# Altium PCB CRF18-1.PcbDoc (part 2 of 2)
Units mm, origin at the board's own origin, x right, y up, seen from the top; angles counter-clockwise.
Board outline 161.4 x 100 mm, 4 copper layers (Top Layer, Internal Plane 1, Internal Plane 2, Bottom Layer), stack 1.503 mm thick; 213 components, 165 nets, 674 pads, 349 vias.
Unrouted connection lines stored in the file: 9.
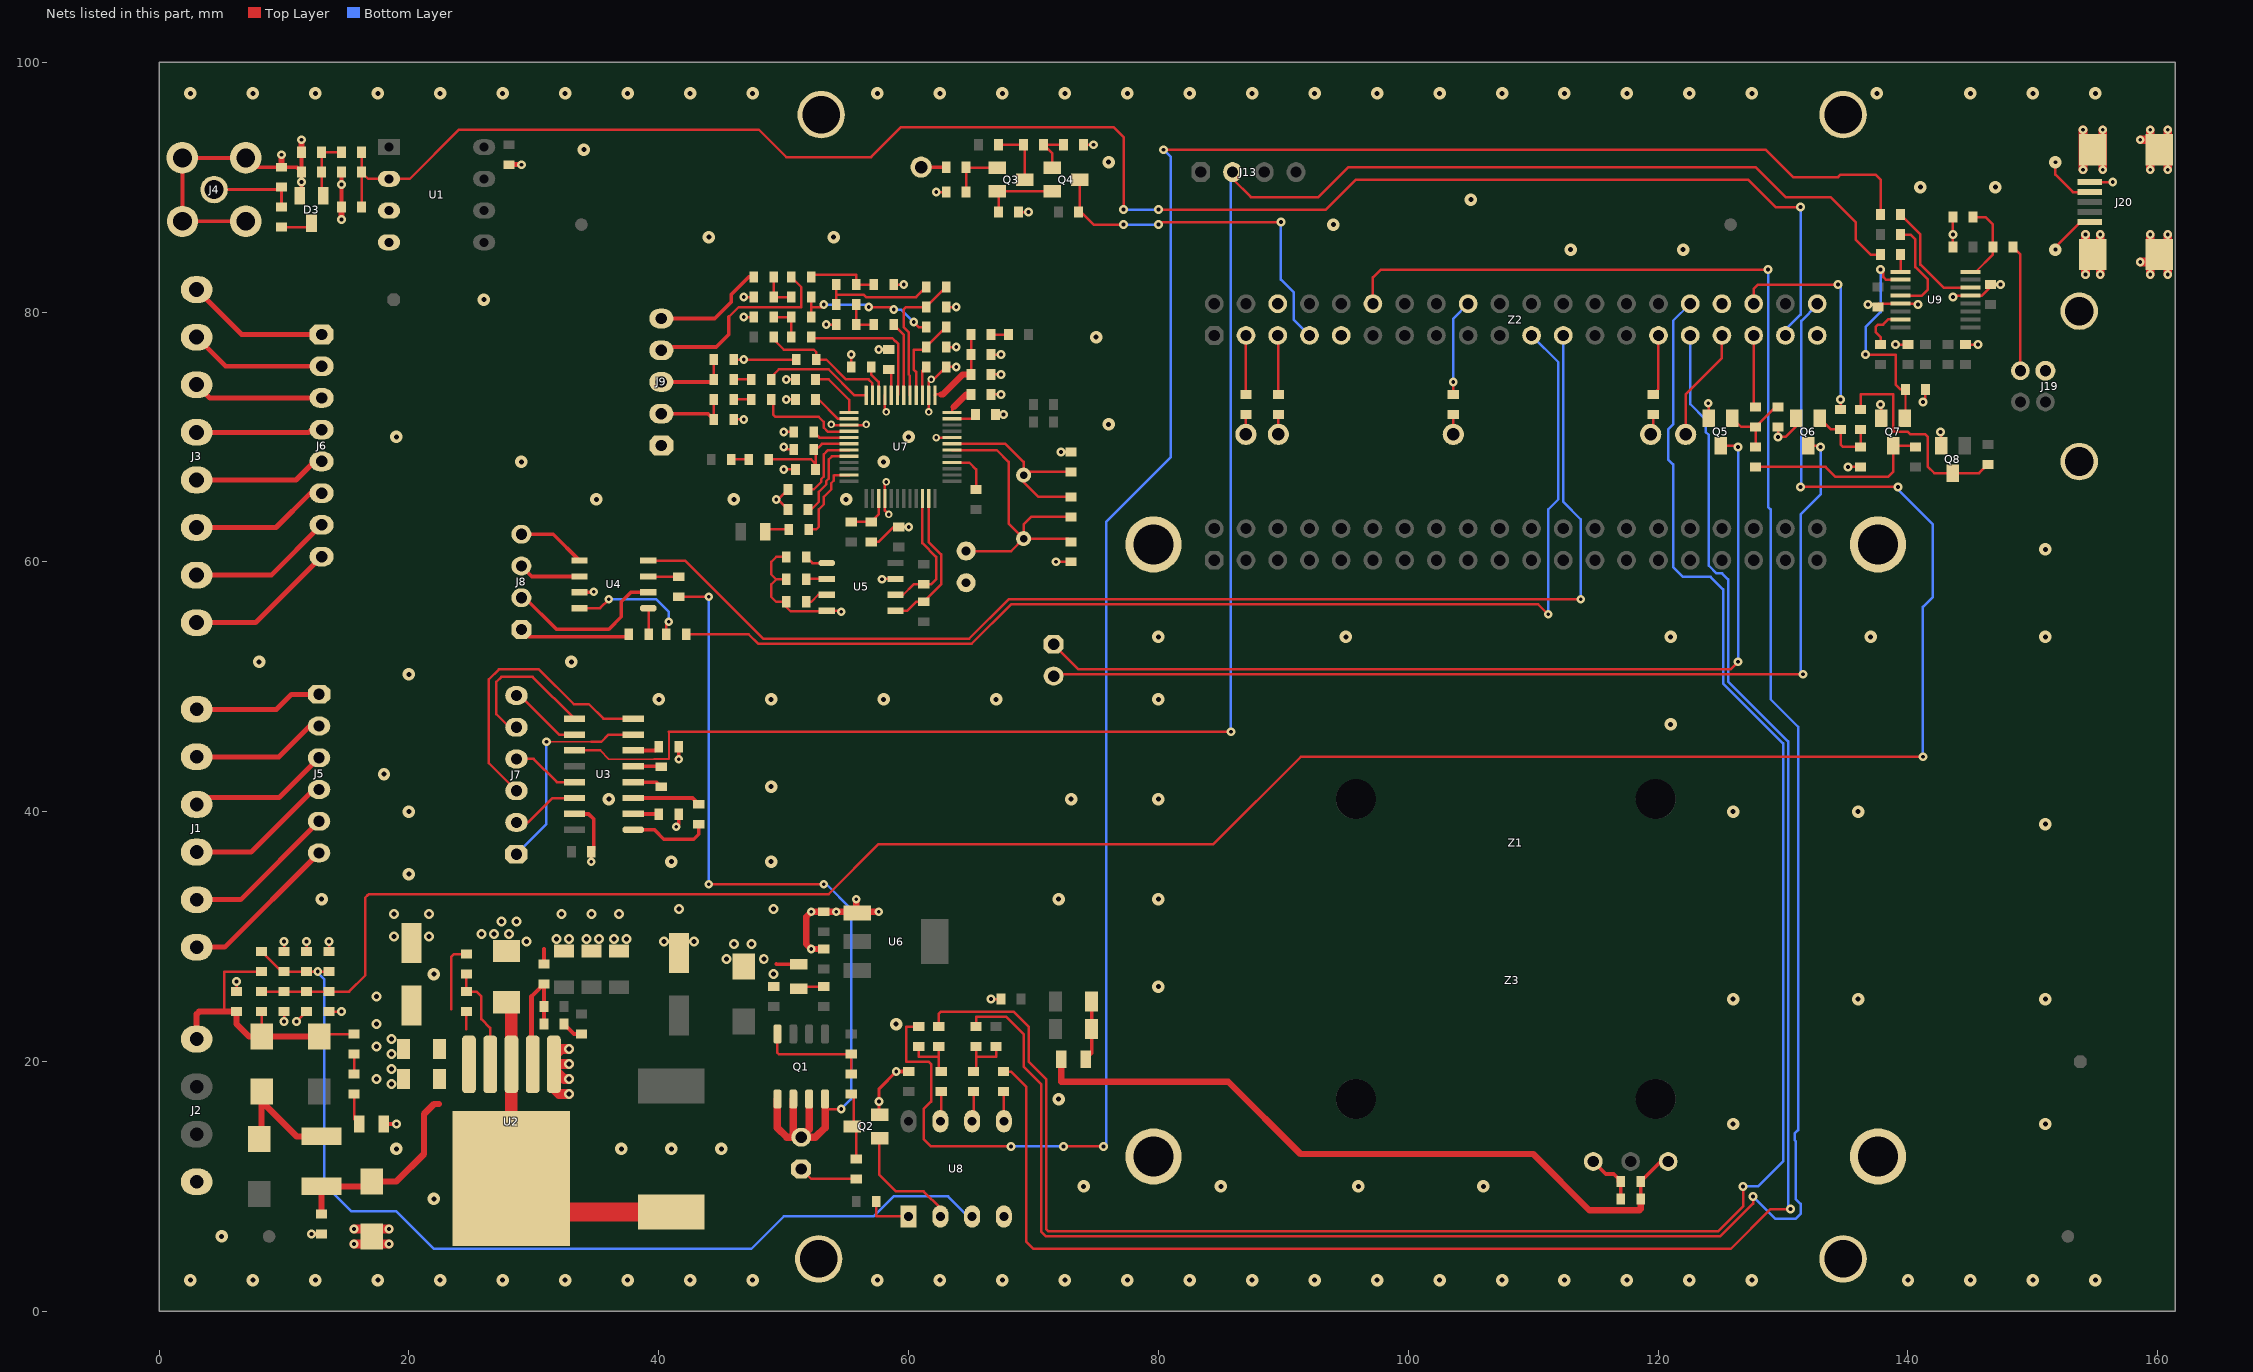
[diagram p4: the nets of this part, all layers, seen from the top]

## Via types
v1: diameter 0.7, hole 0.3, Top Layer to Bottom Layer, tented both sides, 157 vias
v2: diameter 1, hole 0.4, Top Layer to Bottom Layer, 127 vias
v3: diameter 0.8, hole 0.4, Top Layer to Bottom Layer, tented both sides, 40 vias
v4: diameter 0.7, hole 0.3, Top Layer to Bottom Layer, 15 vias
v5: diameter 0.6, hole 0.3, Top Layer to Bottom Layer, tented both sides, 8 vias
v6: diameter 1, hole 0.3, Top Layer to Bottom Layer, 2 vias

## Nets (pads, with @x,y where several pads share a name; then routed paths per layer and width w, separated by ;. In a path a pad name is that pad's centre, name@x,y a point inside that pad or via, vN(x,y) a via of type N, cw(c..) or ccw(c..) an arc to the next point about the centre after c; other vN are vias at no path point) (continued)
FTXD: J13.2 R80.1 U3.11 | length 157.6
  Top Layer w0.15: 35.295,44.905 36,44.2 39.611,44.2 39.636,44.225 40.764,44.225 40.789,44.2 40.8,44.2 40.8,46.4
  Top Layer w0.2: U3.11@33.25,44.905 35.295,44.905 ; 40.8,46.4 v1(85.8,46.4) ; J13.2@85.93,91.2 85.93,90.67 87.4,89.2 92.8,89.2 95.2,91.6 127.8,91.6 130.2,89.2 133.8,89.2 135.8,87.2 135.8,85.8 137,84.6 R80.1@137.8,84.6
  Bottom Layer w0.2: v1(85.8,46.4) 85.8,91.07 J13.2@85.93,91.2
FWDIN: R46.1 R82.1 | length 170.3
  Top Layer w0.2: R46.1@60.8,22.8 59.8,22.8 59.8,20 61.6,20 61.8,19.8 61.8,16.8 61.2,16.2 61.2,13.8 61.8,13.2 v4(68.2,13.2) ; v4(72.4,13.2) v1(75.6,13.2) ; v1(80.4,93) 128.6,93 130.8,90.8 134.4,90.8 134.6,91 137.4,91 137.8,90.6 R82.1@137.8,87.8
  Bottom Layer w0.2: v4(68.2,13.2) v4(72.4,13.2) ; v1@75.8,13.2 75.8,63.2 81,68.4 81,92.4 v1(80.4,93)
GND: C1.2 C3.2 C4.2 C5.2 C6.2 C7.1 C8.2 C9.2 C10.2 C12.2 C14.2 C15.2 C16.2 C17.2 C18.2 C19.1 C20.1 C23.2 C24.2 C25.2 C26.2 C28.1 C29.2 C30.1 C31.2 C32.2 C33.2 C34.2 C35.2 C37.2 C38.2 C39.1 C40.2 C41.2 C42.2 C43.2 C44.1 C45.2 C46.1 C47.1 C48.2 C49.2 C50.2 C51.2 C52.2 C53.2 C54.2 C55.1 C56.1 C57.2 D3.2 D5.K D6.A D7.A D8.A D10.K J2.4 J4.1 J9.1 J10.1 J19.4 J19.5 J19.6 J20.BODY J20.GND pad. Q2.S Q5.S Q6.S Q7.S Q8.S R3.2 R4.1 R5.1 R6.2 R7.1 R8.1 R9.2 R14.2 R24.2 R26.1 R27.1 R28.1 R29.1 R30.1 R35.2 R41.2 R43.2 R45.2 R51.2 R58.2 R67.2 R75.2 R77.2 R83.1 R87.1 R88.2 U1.3 U1.4 U2.1 U3.15 U4.7 U5.4 U5.7 U6.1 U7.8 U7.14 U7.21 U7.27 U7.40 U8.4 U9.5 U9.13 Z1.0 Z2.6 Z2.9 Z2.34 Z2.39 Z3.3 | length 197.5
  Top Layer w0.2: C1.2@6.2,25.6 v1(6.2,26.4) ; v1(10,23.2) R4.1@10,24 ; R5.1@10,28.8 v1(10,29.6) ; v1(11,23.2) 11.2,23.4 R7.1@11.8,24 ; R8.1@11.8,28.8 v1(11.8,29.6) ; C5.2@13.6,24 v1(14.6,24) ; C6.2@13.6,28.8 v1(13.6,29.6) ; C23.2@46,71.4 v1(46.8,71.4) ; C24.2@46,76.2 v1(46.8,76.2) R35.2@51,76.2 ; v1(46.8,79.6) C25.2@47.6,79.6 ; v1(46.8,81.2) R24.2@47.6,81.2 ; v1(49.4,65) v1@49.55,65 ; v1(50,67.4) C30.1@50.95,67.4 ; v1(50,69.2) 50.2,69 C28.1@50.8,69 ; v1(50,70.4) C29.2@50.8,70.4 ; R27.1@50.2,58.6 49.4,58.6 ; R28.1@50.2,60.4 49.4,60.4 49,60 49,59 49.4,58.6 ; v1(50.2,73) C31.2@50.95,73 ; v1(50.2,74.6) C32.2@50.95,74.6 ; R29.1@50.35,64.2 v1@49.55,65 ; R30.1@50.35,65.8 v1@49.55,65 ; J10.1@51.4,11.4 52.2,10.6 R41.2@55.8,10.6 ; v1(53.4,79) C35.2@54.2,79 ; v5(53.8,71) 53.85,70.95 U7.27@55.225,70.95 56.55,70.95 v5(56.6,71) ; v1(54.6,56) 54.505,56.095 U5.4@53.45,56.095 53.45,56.05 50.55,56.05 50.2,56.4 R26.1@50.2,56.8 49.4,56.8 49,57.2 49,58.2 49.4,58.6 ; C37.2@55.4,75.6 v1(55.4,76.6) ; R43.2@57,61.6 57.6,61.6 58.8,62.8 C39.1@59.2,62.8 v1(60,62.8) ; v1(57.6,77) C38.2@58.4,77 ; v1(57.87,58.6) 57.835,58.635 U5.7@58.95,58.635 ; U7.21@58.1,73.325 58.1,72.1 v5(58.2,72) ; v5(58.2,66.4) 58.1,66.3 U7.40@58.1,65.075 58.1,64.1 v5(58.4,63.8) ; R45.2@58.8,82.2 v1(59.6,82.2) ; v5(61.6,72) U7.14@61.6,73.325 61.6,74.4 v5(61.8,74.6) 62,74.6 C41.2@63,75.6 v1(63.8,75.6) ; v5(62.2,69.95) U7.8@63.475,69.95 ; v1(62.2,89.6) R51.2@63,89.6 ; C42.2@63,77.2 v1(63.8,77.2) ; C43.2@63,80.4 v1(63.8,80.4) ; v4(66.6,25) C49.2@67.4,25 ; C45.2@66.6,73.4 v1(67.4,73.4) ; C46.1@66.6,75 v1(67.4,75) ; C47.1@66.6,76.6 v1(67.4,76.6) ; C48.2@66.95,71.8 v1(67.6,71.8) ; R58.2@68.8,88 v1(69.6,88) ; v1(71.8,60) C50.2@73,60 ; v1(72.2,68.8) C51.2@73,68.8 ; R67.2@74,93.4 v1(74.8,93.4) ; v1(124,72.7) 124.05,72.75 Q5.S@124.05,71.5 ; R75.2@129.6,70.8 v1(129.6,70) 130.2,70 131.05,70.85 Q6.S@131.05,71.5 ; v1(135.2,67.6) R77.2@136.2,67.6 ; v1(136.8,80.6) 137.6,80.6 137.682,80.682 U9.5@139.4,80.682 140.718,80.682 v1(140.8,80.6) ; v1(137.8,72.6) 137.85,72.55 Q7.S@137.85,71.5 ; v1(139,77.4) C55.1@140,77.4 ; v1(141.2,72.8) 141.4,73 R83.1@141.4,73.8 ; v1(142.6,70.4) 142.65,70.35 Q8.S@142.65,69.3 ; v1(143.6,81.2) 143.717,81.317 U9.13@145,81.317 145.917,81.317 146.6,82 C57.2@146.6,82.2 v1(147.4,82.2) ; R87.1@143.6,85.2 v1(143.6,86.2) R88.2@143.6,87.6 ; C56.1@144.6,77.4 v1(145.6,77.4) ; J20.GND@154.55,90.4 v1(156.4,90.4)
  Top Layer w0.25: Q2.S@57.632,15.74 v4(57.632,16.8) 57.632,17.832 v1(59,19.2)
  Top Layer w0.3: J4.1@6.94,87.26 J4.1@1.86,87.26 J4.1@1.86,92.34 J4.1@6.94,92.34 7.68,91.6 R3.2@9.8,91.6 11,91.6 R6.2@11.4,91.2 ; D3.2@11.25,89.3 11.4,89.45 v1(11.4,90.4) R6.2@11.4,91.2 ; C3.2@11.4,92.8 R6.2@11.4,91.2 ; v1(12.2,6.2) C4.2@13,6.2 ; R9.2@14.6,88.4 C7.1@14.6,91.2 ; D5.K@17.985,15 v1(19,15) ; R14.2@30.8,27.8 30.8,29 ; U3.15@33.25,39.825 34.375,39.825 34.8,39.4 34.8,37 C15.2@34.6,36.8 v1(34.6,36) ; U4.7@33.65,57.565 34.765,57.565 v1(34.8,57.6) ; v1(41.4,38.8) 41.6,39 C19.1@41.6,39.8 ; v1(41.6,44.2) C20.1@41.6,45.2 ; 49.4,27.8 49.415,27.785 D10.K@51.2,27.785 ; Z3.3@114.8,12 115.8,11 116.449,11 116.8,10.649 116.8,10.4 C53.2@117,10.4 C52.2@117,9
  Top Layer w0.33: v1(59,19.2) C40.2@60,19.2
  Top Layer w0.4: C12.2@28,91.8 v1(29,91.8)
  Top Layer w0.5: R3.2@9.8,91.6 v1(9.8,92.6) ; C3.2@11.4,92.8 v1(11.4,93.8) ; v1(14.6,87.4) R9.2@14.6,88.4 ; C33.2@53.2,29 v1(52.2,29) 51.8,29.4 51.8,31.6 v1(52.2,32) C34.2@53.2,32 U6.1@55.8,32 ; v1(55.8,33) U6.1@55.8,32 ; U6.1@55.9,31.9 U6.1@55.8,32 ; v1(57.6,32) U6.1@55.8,32
  Top Layer w0.7: v1(15.6,5.4) v1(18.4,5.4) ; v1(15.6,6.6) v1(18.4,6.6) ; v1(154,91.4) v1(154,94.6) ; v1(154.2,83) v1(154.2,86.2) ; v1(155.4,83) v1(155.4,86.2) ; v1(155.6,91.4) v1(155.6,94.6) ; v1(158.6,84) J20.BODY@159.4,84 ; v1(158.6,93.8) J20.BODY@159.4,93.8 ; v1(159.4,83) J20.BODY@159.4,84 ; v1(159.4,86.2) J20.BODY@159.4,84 ; v1(159.4,91.4) J20.BODY@159.4,93.8 ; v1(159.4,94.6) J20.BODY@159.4,93.8 ; J20.BODY@159.5,84 J20.BODY@159.4,84 ; J20.BODY@160.1,93.1 J20.BODY@159.4,93.8 ; v1(160.8,83) v1(160.8,86.2) ; v1(160.8,91.4) v1(160.8,94.6)
  Top Layer w0.8: v3(32.8,17.4) 32,17.4 31.6,17.8 U2.1@31.6,19.4 ; v3(32.8,18.6) 32.4,18.6 U2.1@31.6,19.4 ; v3(32.8,19.8) 31.625,19.8 U2.1@31.6,19.775 ; v3(32.8,21) 32.2,21 31.6,20.4 U2.1@31.6,19.775 ; U2.1@31.6,19.4 U2.1@31.6,19.775
  other v1: 54.2,32 14.6,90.2
  other v2: 2.5,2.5 7.5,2.5 12.5,2.5 17.5,2.5 22.5,2.5 27.5,2.5 32.5,2.5 37.5,2.5 42.5,2.5 47.5,2.5 57.5,2.5 62.5,2.5 67.5,2.5 72.5,2.5 77.5,2.5 82.5,2.5 87.5,2.5 92.5,2.5 97.5,2.5 102.5,2.5 107.5,2.5 112.5,2.5 117.5,2.5 122.5,2.5 127.5,2.5 140,2.5 145,2.5 150,2.5 155,2.5 5,6 22,9 74,10 85,10 96,10 106,10 19,13 37,13 41,13 45,13 126,15 151,15 72,17 59,23 126,25 136,25 151,25 80,26 22,27 13,33 72,33 80,33 20,35 41,36 49,36 151,39 20,40 126,40 136,40 36,41 73,41 80,41 49,42 18,43 121,47 40,49 49,49 58,49 67,49 80,49 20,51 8,52 33,52 80,54 95,54 121,54 137,54 151,54 151,61 35,65 46,65 55,65 29,68 58,68 19,70 60,70 76,71 75,78 26,81 113,85 122,85 44,86 54,86 94,87 105,89 141,90 147,90 76,92 34,93 2.5,97.5 7.5,97.5 12.5,97.5 17.5,97.5 22.5,97.5 27.5,97.5 32.5,97.5 37.5,97.5 42.5,97.5 47.5,97.5 57.5,97.5 62.5,97.5 67.5,97.5 72.5,97.5 77.5,97.5 82.5,97.5 87.5,97.5 92.5,97.5 97.5,97.5 102.5,97.5 107.5,97.5 112.5,97.5 117.5,97.5 122.5,97.5 127.5,97.5 137.5,97.5 145,97.5 150,97.5 155,97.5
  other v3: 18.6,18.2 17.4,18.6 18.6,19.4 18.6,20.6 17.4,21.2 18.6,21.8 17.4,23 17.4,25.2 49.2,27 45.4,28.2 48.4,28.2 46,29.4 47.4,29.4 29.4,29.6 40.4,29.6 42.8,29.6 31.8,29.8 32.8,29.8 34.2,29.8 35.2,29.8 36.4,29.8 37.4,29.8 18.8,30 21.6,30 25.8,30.2 26.8,30.2 28,30.2 27.4,31.2 28.6,31.2 18.8,31.8 21.6,31.8 32.2,31.8 34.6,31.8 36.8,31.8 41.6,32.2 49.2,32.2
GPIN: R18.2 Z2.21 | length 94.5
  Top Layer w0.2: R18.2@42.2,54.2 47.2,54.2 47.95,53.45 65.05,53.45 68.2,56.6 110.4,56.6 v1(111.2,55.8)
  Bottom Layer w0.2: Z2.21@109.867,78.126 112,75.993 112,65 111.2,64.2 v1(111.2,55.8)
GPIO1PPS: Q4.D R66.2 Z2.7 | length 29.4
  Top Layer w0.2: R66.2@73.6,88 R66.2@73.7,88.1 ; Q4.D@73.7,90.6 R66.2@73.7,88.1 ; v1(77.2,87) 74.8,87 R66.2@73.7,88.1 ; v1(80,87) 80,87.2 v1(89.8,87.2)
  Bottom Layer w0.2: v1(77.2,87) v1(80,87) ; v1(89.8,87.2) 89.8,82.6 90.813,81.587 90.813,79.4 Z2.7@92.087,78.126
GPLEDA: J8.1 R17.1 | length 8.9
  Top Layer w0.3: J8.1@29,54.59 29.59,54 37.4,54 R17.1@37.6,54.2
GPLEDK: J8.2 U4.2 | length 13.1
  Top Layer w0.3: J8.2@29,57.13 29.27,57.13 31.8,54.6 36,54.6 37,55.6 37,56.8 37.765,57.565 U4.2@39.15,57.565
GPOUT: U4.4 Z2.23 | length 100.2
  Top Layer w0.2: U4.4@39.15,60.105 42.095,60.105 48.35,53.85 64.85,53.85 68,57 v1(113.8,57)
  Bottom Layer w0.2: Z2.23@112.407,78.126 112.407,64.793 113.8,63.4 v1(113.8,57)
GPQC: J8.3 U4.6 | length 5
  Top Layer w0.3: J8.3@29,59.67 29.835,58.835 U4.6@33.65,58.835
GPQE: J8.4 U4.5 | length 5.5
  Top Layer w0.3: J8.4@29,62.21 31.545,62.21 U4.5@33.65,60.105
IDA: J20.ID | length 4.3
  Top Layer w0.2: v6(151.8,92) 151.8,91 153.2,89.6 J20.ID@154.55,89.6
NetC2_2: C2.2 D3.3 | length 2.5
  Top Layer w0.2: C2.2@9.8,86.8 11.9,86.8 D3.3@12.2,87.1
NetC3_1: C3.1 D3.1 R6.1 R10.2 | length 5
  Top Layer w0.2: D3.1@13,89.45 R6.1@13,91.2 C3.1@13,92.8 R10.2@14.6,92.8
NetC11_2: C11.2 R13.1 U2.4 | length 8.5
  Top Layer w0.2: C11.2@24.6,27 R13.1@24.6,25.6 25.4,25.6 25.8,25.2 25.8,23.4 26.5,22.7 U2.4@26.5,19.775
NetC19_2: C19.2 U3.2 | length 2.1
  Top Layer w0.3: U3.2@37.95,39.825 39.975,39.825 C19.2@40,39.8
NetC20_2: C20.2 U3.6 | length 2.2
  Top Layer w0.3: U3.6@37.95,44.905 39.705,44.905 C20.2@40,45.2
NetC21_1: C21.1 U3.4 | length 2.4
  Top Layer w0.3: U3.4@37.95,42.365 39.835,42.365 C21.1@40.2,42
NetC21_2: C21.2 U3.5 | length 2.3
  Top Layer w0.3: U3.5@37.95,43.635 40.165,43.635 C21.2@40.2,43.6
NetC22_1: C22.1 U3.1 | length 6.5
  Top Layer w0.3: U3.1@37.95,38.555 39.645,38.555 40.4,37.8 42.8,37.8 43.2,38.2 C22.1@43.2,39
NetC22_2: C22.2 U3.3 | length 5.5
  Top Layer w0.3: U3.3@37.95,41.095 42.705,41.095 C22.2@43.2,40.6
NetC25_1: C25.1 R32.2 R33.1 | length 3
  Top Layer w0.2: C25.1@49.2,79.6 R33.1@50.6,79.6 R32.2@50.6,78
NetC27_1: C27.1 L6.2 R33.2 | length 11.7
  Top Layer w0.2: R33.2@52.2,79.6 52.2,80.4 ; C27.1@52.2,81.2 52.2,80.4 ; v1(53.2,80.6) 53,80.4 52.2,80.4 ; v1(56.8,80.4) 58.6,80.4 v1(58.8,80.2) ; v1(60.4,79.2) 60.8,78.8 L6.2@61.4,78.8
  Bottom Layer w0.2: v1(53.2,80.6) 56.8,80.6 v1(56.8,80.4) ; v1(58.8,80.2) 59.4,80.2 v1(60.4,79.2)
NetC27_2: C27.2 R24.1 R25.1 | length 3
  Top Layer w0.2: R25.1@49.2,82.8 R24.1@49.2,81.2 C27.2@50.6,81.2
NetC28_2: C28.2 C30.2 L3.1 U7.30 | length 8.5
  Top Layer w0.2: L3.1@48.8,68.2 52.2,68.2 C30.2@52.55,67.85 ; C30.2@52.55,67.4 C30.2@52.55,67.85 ; U7.30@55.225,69.45 53.05,69.45 52.4,68.8 52.55,68.65 C30.2@52.55,67.85
NetC29_1: C29.1 U7.29 | length 3
  Top Layer w0.2: C29.1@52.4,70.4 52.85,69.95 U7.29@55.225,69.95
NetC31_1: C31.1 U7.26 | length 3.3
  Top Layer w0.2: C31.1@52.55,73 52.8,73 54.35,71.45 U7.26@55.225,71.45
NetC32_1: C32.1 U7.25 | length 4.4
  Top Layer w0.2: C32.1@52.55,74.6 53.6,74.6 55.225,72.975 U7.25@55.225,71.95
NetC35_1: C35.1 R37.1 R44.2 | length 3
  Top Layer w0.2: R37.1@55.8,80.6 C35.1@55.8,79 R44.2@57.2,79
NetC36_1: C36.1 L7.2 R37.2 | length 9.2
  Top Layer w0.2: R37.2@54.2,80.6 54.2,81.4 ; C36.1@54.2,82.2 54.2,81.4 ; L7.2@61.4,82 60.6,81.2 56.6,81.2 56.4,81.4 54.2,81.4
NetC36_2: C36.2 R34.1 R45.1 | length 5.9
  Top Layer w0.2: R34.1@52.2,82.8 52.4,83 55.8,83 C36.2@55.8,82.2 R45.1@57.2,82.2
NetC37_1: C37.1 U7.22 | length 2.5
  Top Layer w0.2: C37.1@57,75.6 57,75 57.6,74.4 U7.22@57.6,73.325
NetC38_1: C38.1 U7.20 | length 2.2
  Top Layer w0.2: C38.1@58.4,75.4 58.6,75.2 U7.20@58.6,73.325
NetC41_1: C41.1 U7.15 | length 2.4
  Top Layer w0.2: U7.15@61.1,73.325 61.1,75.3 C41.1@61.4,75.6
NetC42_1: C42.1 L6.1 U7.16 | length 7.1
  Top Layer w0.2: U7.16@60.6,73.325 60.6,75.2 60.4,75.4 60.4,77 61.2,77 C42.1@61.4,77.2 L6.1@63,78.8
NetC43_1: C43.1 L7.1 U7.17 | length 11.2
  Top Layer w0.2: U7.17@60.1,73.325 60.1,74.9 60,75 60,78.4 59.6,78.8 59.6,80.2 59.8,80.4 C43.1@61.4,80.4 L7.1@63,82
NetC44_2: C44.2 C50.1 R68.2 U7.6 Y1.1 | length 25.7
  Top Layer w0.2: U7.6@63.475,68.95 67.05,68.95 68,68 68,63.06 Y1.1@69.2,61.86 ; C44.2@64.6,60.87 68.21,60.87 Y1.1@69.2,61.86 ; C50.1@73,61.6 72.74,61.86 Y1.1@69.2,61.86 ; R68.2@73,63.6 69.8,63.6 69.2,63 Y1.1@69.2,61.86
NetC45_1: C45.1 U7.12 | length 2.3
  Top Layer w0.2: U7.12@63.475,71.95 63.475,72.275 63.6,72.4
  Top Layer w0.5: 63.6,72.4 64.6,73.4 C45.1@65,73.4
NetC46_2: C46.2 C47.2 L8.2 U7.13 | length 6.8
  Top Layer w0.2: U7.13@62.1,73.325 62.175,73.4 62.6,73.4 ; C46.2@65,75 C47.2@65,76.6 L8.2@65,78.2
  Top Layer w0.5: 62.6,73.4 62.731,73.4 64.331,75 C46.2@65,75
NetC48_1: C48.1 U7.11 | length 2
  Top Layer w0.2: U7.11@63.475,71.45 65,71.45 C48.1@65.35,71.8
NetC51_1: C51.1 R68.1 U7.7 Y1.2 | length 16.1
  Top Layer w0.2: U7.7@63.475,69.45 67.75,69.45 69.2,68 Y1.2@69.2,66.94 ; R68.1@73,65.2 70.4,65.2 69.2,66.4 Y1.2@69.2,66.94 ; C51.1@73,67.2 69.46,67.2 Y1.2@69.2,66.94
NetC52_1: C52.1 C53.1 L9.2 Z3.1 | length 57.6
  Top Layer w0.3: C52.1@118.6,9 C53.1@118.6,10.4 120.2,12 Z3.1@120.8,12
  Top Layer w0.5: L9.2@72.215,20.2 72.215,18.385 85.585,18.385 91.37,12.6 110,12.6 114.5,8.1 118.5,8.1 118.6,8.2 C52.1@118.6,9
NetD1_K: D1.K D2.K L1.1 | length 9.8
  Top Layer w0.5: D1.K@8,13.8 8.2,14 D2.K@8.2,16.8 ; D2.K@8.2,17.6 D2.K@8.2,16.8 ; L1.1@13,14 11,14 D2.K@8.2,16.8
NetD5_A: D5.A R11.2 | length 2.6
  Top Layer w0.2: R11.2@15.6,17.4 15.6,15.415 D5.A@16.015,15
NetD9_K: D9.K R31.1 | length 1.9
  Top Layer w0.2: D9.K@48.535,62.4 48.735,62.6 R31.1@50.4,62.6
NetD10_A: D10.A R36.2 | length 2.1
  Top Layer w0.2: D10.A@51.2,25.815 51.385,26 R36.2@53.2,26
NetJ1_1: J1.1 J5.1 | length 10.3
  Top Layer w0.4: J1.1@3,48.2 9.4,48.2 10.6,49.4 J5.1@12.8,49.4
NetJ1_2: J1.2 J5.2 | length 10.8
  Top Layer w0.4: J1.2@3,44.39 9.59,44.39 12.06,46.86 J5.2@12.8,46.86
NetJ1_3: J1.3 J5.3 | length 11.3
  Top Layer w0.4: J1.3@3,40.58 3.54,41.12 9.6,41.12 J5.3@12.8,44.32
NetJ1_4: J1.4 J5.4 | length 11.9
  Top Layer w0.4: J1.4@3,36.77 7.37,36.77 12.38,41.78 J5.4@12.8,41.78
NetJ1_5: J1.5 J5.5 | length 12.4
  Top Layer w0.4: J1.5@3,32.96 6.52,32.96 J5.5@12.8,39.24
NetJ1_6: J1.6 J5.6 | length 12.9
  Top Layer w0.4: J1.6@3,29.15 5.25,29.15 J5.6@12.8,36.7
NetJ3_1: J3.1 J6.1 | length 11.5
  Top Layer w0.4: J3.1@3,81.8 6.6,78.2 J6.1@13,78.2
NetJ3_2: J3.2 J6.2 | length 11
  Top Layer w0.4: J3.2@3,77.99 5.33,75.66 J6.2@13,75.66
NetJ3_3: J3.3 J6.3 | length 10.4
  Top Layer w0.4: J3.3@3,74.18 4.06,73.12 J6.3@13,73.12
NetJ3_4: J3.4 J6.4 | length 10.1
  Top Layer w0.4: J3.4@3,70.37 11.97,70.37 12.18,70.58 J6.4@13,70.58
NetJ3_5: J3.5 J6.5 | length 10.6
  Top Layer w0.4: J3.5@3,66.56 10.96,66.56 12.44,68.04 J6.5@13,68.04
NetJ3_6: J3.6 J6.6 | length 11.1
  Top Layer w0.4: J3.6@3,62.75 9.35,62.75 12.1,65.5 J6.6@13,65.5
NetJ3_7: J3.7 J6.7 | length 11.7
  Top Layer w0.4: J3.7@3,58.94 8.98,58.94 J6.7@13,62.96
NetJ3_8: J3.8 J6.8 | length 12.2
  Top Layer w0.4: J3.8@3,55.13 7.71,55.13 J6.8@13,60.42
NetJ19_1: J19.1 R90.1 | length 10.1
  Top Layer w0.2: R90.1@148.4,85.2 149,84.6 J19.1@149,75.3
NetL3_2: L3.2 R20.2 | length 1.4
  Top Layer w0.2: R20.2@45.8,68.2 L3.2@47.2,68.2
NetL4_1: L4.1 U7.28 | length 8.2
  Top Layer w0.2: L4.1@49,73 49.15,72.85 49.15,71.8 49.35,71.6 52.8,71.6 53.2,71.2 53.2,70.751 53.551,70.4 55.225,70.4 U7.28@55.225,70.45
NetL4_2: L4.2 R21.2 | length 1.4
  Top Layer w0.2: R21.2@46,73 L4.2@47.4,73
NetL5_1: L5.1 U7.24 | length 8.9
  Top Layer w0.2: L5.1@49,74.6 49,74.8 49.6,75.4 53.6,75.4 55.675,73.325 U7.24@56.6,73.325
NetL5_2: L5.2 R22.2 | length 1.4
  Top Layer w0.2: R22.2@46,74.6 L5.2@47.4,74.6
NetL8_1: L8.1 R60.1 | length 1.4
  Top Layer w0.2: L8.1@66.6,78.2 R60.1@68,78.2
NetL9_1: L9.1 R64.1 R65.1 | length 4.8
  Top Layer w0.3: L9.1@74.185,20.2 74.65,20.665 R64.1@74.65,22.6 R65.1@74.65,24.8
NetQ1_G: Q1.G R38.1 R39.2 | length 9
  Top Layer w0.2: Q1.G@49.495,22.203 49.495,20.705 49.6,20.6 R39.2@55.4,20.6 R38.1@55.4,19
NetQ2_D: Q2.D R38.2 R41.1 | length 5.4
  Top Layer w0.2: R38.2@55.4,17.4 55.6,17.2 55.6,14.8 55.8,14.6 R41.1@55.8,12.2
NetQ3_D: Q3.D R56.2 R61.2 | length 4.8
  Top Layer w0.2: R56.2@67.2,93.4 R61.2@69.2,93.4 69.3,93.3 Q3.D@69.3,90.6
NetQ3_G: Q3.G R51.1 R52.1 | length 4.5
  Top Layer w0.2: R51.1@64.6,89.6 R52.1@64.6,91.6 64.65,91.55 Q3.G@67.1,91.55
NetQ3_S: Q3.S Q4.S R58.1 | length 6.1
  Top Layer w0.2: R58.1@67.2,88 67.2,89.55 Q3.S@67.1,89.65 Q4.S@71.5,89.65
NetQ4_G: Q4.G R61.1 R67.1 | length 3.7
  Top Layer w0.2: Q4.G@71.5,91.55 71.5,92.7 R61.1@70.8,93.4 R67.1@72.4,93.4
NetQ5_G: Q5.G R73.2 R74.1 R75.1 | length 6.2
  Top Layer w0.2: Q5.G@125.95,71.5 126.65,70.8 R74.1@127.8,70.8 ; R73.2@127.8,69.2 R74.1@127.8,70.8 ; R75.1@129.6,72.4 129.4,72.4 R74.1@127.8,70.8
NetQ6_G: Q6.G R76.1 R77.1 R78.2 | length 6.3
  Top Layer w0.2: Q6.G@132.95,71.5 133.85,70.6 R76.1@134.6,70.6 134.6,69.4 134.8,69.2 R77.1@136.2,69.2 R78.2@136.2,70.6
NetR11_1: R11.1 R12.2 | length 1.6
  Top Layer w0.2: R11.1@15.6,19 R12.2@15.6,20.6
NetR15_1: R15.1 R16.2 | length 1.7
  Top Layer w0.3: R15.1@32.4,23 33.2,22.2 R16.2@33.8,22.2
NetR17_2: R17.2 U4.1 | length 2.1
  Top Layer w0.2: U4.1@39.15,56.295 39.2,56.245 R17.2@39.2,54.2
NetR18_1: R18.1 U4.8 | length 9.7
  Top Layer w0.2: U4.8@33.65,56.295 35.295,56.295 v1(36,57) ; R18.1@40.6,54.2 40.6,55 v1(40.8,55.2)
  Bottom Layer w0.2: v1(36,57) 39.8,57 40.8,56 v1(40.8,55.2)
NetR19_2: R19.2 U4.3 | length 2.5
  Top Layer w0.2: U4.3@39.15,58.835 39.185,58.8 R19.2@41.6,58.8
NetR23_2: R23.2 R35.1 U7.23 | length 10.8
  Top Layer w0.2: R23.2@49.1,77.9 50,77 52.4,77 52.6,76.8 R35.1@52.6,76.2 53.4,76.2 55,74.6 56.8,74.6 57.1,74.3 U7.23@57.1,73.325
NetR26_2: R26.2 U5.3 | length 1.9
  Top Layer w0.2: R26.2@51.8,56.8 52.2,56.8 52.765,57.365 U5.3@53.45,57.365
NetR27_2: R27.2 U5.2 | length 1.7
  Top Layer w0.2: R27.2@51.8,58.6 51.835,58.635 U5.2@53.45,58.635
NetR28_2: R28.2 U5.1 | length 1.9
  Top Layer w0.2: R28.2@51.8,60.4 52.295,59.905 U5.1@53.45,59.905
NetR29_2: R29.2 U7.32 | length 6.6
  Top Layer w0.2: R29.2@51.95,64.2 52.2,64.2 52.8,64.8 52.8,65.6 53.4,66.2 53.4,66.46 53.6,66.66 53.6,68.14 53.6,68.2 53.85,68.45 U7.32@55.225,68.45
NetR30_2: R30.2 U7.31 | length 5.8
  Top Layer w0.2: R30.2@51.95,65.8 52.4,65.8 53,66.4 53,66.626 53.2,66.826 53.2,67.974 53.2,68.6 53.55,68.95 U7.31@55.225,68.95
NetR31_2: R31.2 U7.35 | length 6.7
  Top Layer w0.2: R31.2@52,62.6 52.6,62.6 52.8,62.8 52.8,64.2 53.2,64.6 53.2,65.2 53.8,65.8 53.8,66.294 54,66.494 54,66.9 54.05,66.95 U7.35@55.225,66.95
NetR32_1: R32.1 U7.19 | length 11.3
  Top Layer w0.2: R32.1@52.2,77.9 58.7,77.9 58.95,77.65 58.974,77.65 59.15,77.474 59.15,73.375 U7.19@59.1,73.325
NetR40_2: R40.2 R43.1 U7.39 | length 3.7
  Top Layer w0.2: R40.2@55.4,63.2 R43.1@57,63.2 57.6,63.8 U7.39@57.6,65.075
NetR42_2: R42.2 U8.1 | length 3.8
  Top Layer w0.2: R42.2@57.4,8.8 57.4,7.6 U8.1@60,7.6
NetR44_1: R44.1 U7.18 | length 6
  Top Layer w0.2: R44.1@58.8,79 59.6,78.2 U7.18@59.6,73.325
NetR47_2: R47.2 U5.5 U7.47 | length 11.8
  Top Layer w0.2: U5.5@58.95,56.095 59.895,56.095 60.6,56.8 R47.2@61.2,56.8 62.6,58.2 62.6,60.6 61.6,61.6 U7.47@61.6,65.075
NetR48_2: R48.2 U5.6 U7.46 | length 10.7
  Top Layer w0.2: U5.6@58.95,57.365 59.565,57.365 60.4,58.2 R48.2@61.2,58.2 61.8,58.2 62.2,58.6 62.2,60.4 61.1,61.5 U7.46@61.1,65.075
NetR50_1: R50.1 U8.7 | length 2.4
  Top Layer w0.2: U8.7@62.54,15.22 62.6,15.28 R50.1@62.6,17.6
NetR53_1: R53.1 U8.6 | length 2.4
  Top Layer w0.2: U8.6@65.08,15.22 65.2,15.34 R53.1@65.2,17.6
NetR55_2: R55.2 U7.4 | length 3.8
  Top Layer w0.2: U7.4@63.475,67.95 64.85,67.95 65.4,67.4 R55.2@65.4,65.8
NetR59_1: R59.1 U8.5 | length 2.4
  Top Layer w0.2: R59.1@67.6,17.6 67.6,15.24 U8.5@67.62,15.22
NetR79_1: R79.1 U9.7 | length 3.8
  Top Layer w0.2: R79.1@137.8,77.4 137.8,78 137.4,78.4 137.4,78.8 137.6,79 138,79 138.412,79.412 U9.7@139.4,79.412
NetR80_2: R80.2 U9.1 | length 1.4
  Top Layer w0.2: U9.1@139.4,83.222 R80.2@139.4,84.6
NetR81_2: R81.2 U9.4 | length 8.2
  Top Layer w0.2: U9.4@139.4,81.317 141.117,81.317 141.6,81.8 141.6,82.6 140.6,83.6 140.6,85.8 140.2,86.2 R81.2@139.4,86.2
NetR82_2: R82.2 U9.14 | length 9.4
  Top Layer w0.2: R82.2@139.4,87.8 141,86.2 141,83.8 142.848,81.952 U9.14@145,81.952
NetR88_1: R88.1 R90.2 U9.16 | length 6.6
  Top Layer w0.2: U9.16@145,83.222 145.422,83.222 146.8,84.6 R90.2@146.8,85.2 146.8,87 146.2,87.6 R88.1@145.2,87.6
ODTXA: R74.2 Z2.35 | length 5.8
  Top Layer w0.2: Z2.35@127.647,78.126 127.647,72.553 R74.2@127.8,72.4
ODTXB: R76.2 Z2.36 | length 18.2
  Top Layer w0.2: Z2.36@127.647,80.666 127.647,81.847 128,82.2 v1(134.4,82.2) ; R76.2@134.6,72.2 v1(134.6,73)
  Bottom Layer w0.2: v1(134.4,82.2) 134.6,82 v1(134.6,73)
ODURX: R71.2 Z2.18 | length 7.8
  Top Layer w0.2: R71.2@103.6,73.4 v1(103.6,74.4)
  Bottom Layer w0.2: v1(103.6,74.4) 103.6,79.479 Z2.18@104.787,80.666
ODUTX: R72.1 Z2.29 | length 4.9
  Top Layer w0.2: R72.1@119.6,73.4 120.027,73.827 Z2.29@120.027,78.126
OSHDN: R54.2 Z2.12 | length 196
  Top Layer w0.2: R54.2@65.4,22.8 65.4,23.6 67.8,23.6 69.2,22.2 69.2,19.6 70.6,18.2 70.6,6.4 71,6 124.966,6 127.6,8.634 v1(127.6,9.2) ; Z2.12@97.167,80.666 97.167,82.767 97.8,83.4 v1(128.8,83.4)
  Bottom Layer w0.2: v1(127.6,9.2) 129.4,7.4 131,7.4 131.4,7.8 131.4,8.6 131,9 131,13.631 130.95,13.681 130.95,14.269 131.2,14.519 131.2,46.8 129,49 129,64.2 128.8,64.4 v1(128.8,83.4)
OWDIN: R49.2 Z2.32 | length 162.4
  Top Layer w0.2: R49.2@62.4,22.8 62.4,23.8 62.6,24 68.4,24 69.6,22.8 69.6,20 71,18.6 71,6.6 71.2,6.4 124.8,6.4 126.8,8.4 v1(126.8,10)
  Bottom Layer w0.2: Z2.32@122.567,80.666 121.2,79.299 121.2,71 120.8,70.6 120.8,68.2 121.2,67.8 121.2,59.6 122,58.8 124.2,58.8 125.2,57.8 125.2,50.269 130,45.469 130,12 128,10 v1(126.8,10)
PSSDN: Q2.G U8.2 | length 9.6
  Top Layer w0.2: Q2.G@57.632,13.835 57.632,10.968 59,9.6 61.2,9.6 62.54,8.26 U8.2@62.54,7.6
PTTA: J12.1 Q5.D | length 74.5
  Top Layer w0.2: J12.1@71.6,53.4 73.6,51.4 125.8,51.4 v1(126.4,52) ; Q5.D@125,69.3 126.3,69.3 v1(126.4,69.2)
  Bottom Layer w0.2: v1(126.4,52) v1(126.4,69.2)
PTTB: J12.2 Q6.D | length 80.2
  Top Layer w0.2: J12.2@71.4,51.14 71.54,51 v1(131.6,51) ; Q6.D@132,69.3 132.9,69.3 v1(133,69.2)
  Bottom Layer w0.2: v1(131.6,51) 131.4,51.2 131.4,63.8 133,65.4 v1(133,69.2)
PULS: J11.0 R52.2 | length 2
  Top Layer w0.3: J11.0@61,91.6 R52.2@63,91.6
PWM0: J18.0 Z2.33 | length 9.1
  Top Layer w0.2: J18.0@122.2,70.2 122.2,73.4 125.107,76.307 Z2.33@125.107,78.126
R1IN: J7.4 U3.13 | length 5.4
  Top Layer w0.2: J7.4@28.6,44.22 29.98,44.22 31.835,42.365 U3.13@33.25,42.365
R2IN: J7.3 U3.8 | length 23.4
  Top Layer w0.2: J7.3@28.6,41.68 26.4,43.88 26.4,50.6 27.2,51.4 30.4,51.4 33.2,48.6 34.4,48.6 35.555,47.445 U3.8@37.95,47.445
R2OUT: J7.5 U3.9 | length 12.4
  Top Layer w0.2: J7.5@28.6,46.76 28.04,46.76 27,47.8 27,50.4 27.4,50.8 29.895,50.8 U3.9@33.25,47.445
RFENV: C7.2 R9.1 R10.1 U1.2 Z2.37 | length 142.2
  Top Layer w0.2: R9.1@16.2,88.4 C7.2@16.2,91.2 ; R10.1@16.2,92.8 C7.2@16.2,91.2 ; v1(77.2,88.2) 77.2,94 76.4,94.8 59.4,94.8 57,92.4 50.2,92.4 48,94.6 24,94.6 20.06,90.66 U1.2@18.4,90.66 16.74,90.66 C7.2@16.2,91.2 ; v1(80,88.2) 93.4,88.2 95.8,90.6 127.2,90.6 129.4,88.4 v1(131.4,88.4)
  Bottom Layer w0.2: v1(77.2,88.2) v1(80,88.2) ; Z2.37@130.187,78.126 130.187,78.587 131.4,79.8 v1(131.4,88.4)
RFIN: C2.1 J4.2 R3.1 | length 7.1
  Top Layer w0.25: J4.2@4.4,89.8 9.6,89.8 R3.1@9.8,90 C2.1@9.8,88.4
RTS: Q7.D R73.1 R84.2 | length 15.4
  Top Layer w0.2: R73.1@127.8,67.6 133.4,67.6 134.2,66.8 138.4,66.8 138.8,67.2 Q7.D@138.8,69.3 140.5,69.3 R84.2@140.6,69.2
RTSB: Q8.D R78.1 R89.2 | length 17.5
  Top Layer w0.2: R78.1@136.2,72.2 136.2,73.4 138.8,73.4 138.8,70.4 140,70.4 140.2,70.2 141.4,70.2 141.6,70 141.6,67.6 142.1,67.1 Q8.D@143.6,67.1 145.7,67.1 R89.2@146.4,67.8
RTSN: Q7.G R83.2 U9.2 | length 17.8
  Top Layer w0.2: v1(136.6,76.6) 139,76.6 139,74.2 139.4,73.8 R83.2@139.8,73.8 ; v1(137.8,83.4) 138,83.2 138,82.8 138.024,82.8 138.237,82.587 U9.2@139.4,82.587 ; Q7.G@139.75,71.5 139.8,71.55 R83.2@139.8,73.8 ; R83.2@140,73.8 R83.2@139.8,73.8
  Bottom Layer w0.2: v1(136.6,76.6) 136.6,78.8 137.8,80 v1(137.8,83.4)
RXL: J9.5 R25.2 | length 9.1
  Top Layer w0.3: J9.5@40.2,79.48 44.48,79.48 45.8,80.8 45.8,81.4 47.2,82.8 R25.2@47.6,82.8
RXR: J9.4 R34.2 | length 16.2
  Top Layer w0.2: 45.6,79.6 46.4,80.4 51.4,80.4 51.4,82 R34.2@50.6,82.8
  Top Layer w0.3: J9.4@40.2,76.94 40.46,77.2 44.6,77.2 45.6,78.2 45.6,79.6
SCL: J15.0 R70.2 | length 1.6
  Top Layer w0.2: J15.0@89.6,70.2 R70.2@89.6,71.8
SDA: J14.0 R69.2 | length 1.6
  Top Layer w0.2: J14.0@87,70.2 R69.2@87,71.8
SFB: C13.2 R14.1 R15.2 U2.2 | length 10.1
  Top Layer w0.3: 29.8,25.2 R14.1@30.8,26.2 C13.2@30.8,24.4 R15.2@30.8,23
  Top Layer w0.4: 29.8,25.2 29.8,19.875 U2.2@29.9,19.775
SHDN: R53.2 R54.1 R57.2 | length 4.5
  Top Layer w0.2: R53.2@65.2,19.2 65.4,19.4 65.4,20.4 ; R54.1@65.4,21.2 65.4,20.4 ; R57.2@67,21.2 67,20.4 65.4,20.4
SSW: D7.K L2.1 U2.0 U2.3 | length 28.1
  Top Layer w1: D7.K@28,24.75 28.2,24.55 U2.3@28.2,19.775 U2.0@28.2,10.625
  Top Layer w1.5: U2.0@28.2,10.625 30.875,7.95 L2.1@41,7.95
SV: C4.1 C8.1 C9.1 C10.1 C11.1 D6.K L1.2 R13.2 U2.5 | length 23.1
  Top Layer w0.2: 23.4,24.2 23.4,28.4 23.6,28.6 C11.1@24.6,28.6 ; 24.6,22.6 R13.2@24.6,24
  Top Layer w0.5: C4.1@13,7.8 L1.2@13,10 16.6,10 D6.K@17,10.4 19,10.4 21.2,12.6 21.2,15.8 22,16.6 22.4,16.6
SW5: J10.2 Q1.D R19.1 | length 70.8
  Top Layer w0.2: R19.1@41.6,57.2 v1(44,57.2) ; v1(44,34.2) v1(53.2,34.2) ; 53.305,16.2 v1(54.6,16.2)
  Top Layer w0.6: Q1.D@49.495,16.996 49.495,14.705 50.26,13.94 J10.2@51,13.94 ; Q1.D@50.765,16.996 50.765,14.175 J10.2@51,13.94 ; Q1.D@52.035,16.996 52.035,14.575 J10.2@51.4,13.94 ; Q1.D@53.305,16.996 53.305,16.2 53.305,14.705 52.54,13.94 J10.2@51.4,13.94 ; J10.2@51,13.94 J10.2@51.4,13.94
  Bottom Layer w0.2: v1(44,34.2) v1(44,57.2) ; v1(53.2,34.2) 53.4,34.2 55.4,32.2 55.4,17 v1(54.6,16.2)
T2IN: J7.6 U3.10 | length 5.9
  Top Layer w0.2: J7.6@28.6,49.3 28.9,49.3 32.025,46.175 U3.10@33.25,46.175
T2OUT: J7.1 U3.7 | length 17.2
  Top Layer w0.15: v1(31,45.6) 34.6,45.6
  Top Layer w0.2: 34.6,45.6 35.4,45.6 35.975,46.175 U3.7@37.95,46.175
  Bottom Layer w0.2: J7.1@28.6,36.6 31,39 v1(31,45.6)
TIOUT: J7.2 U3.14 | length 5.5
  Top Layer w0.2: J7.2@28.6,39.14 29.54,39.14 31.495,41.095 U3.14@33.25,41.095
TXL: C24.1 J9.3 R22.1 | length 5.9
  Top Layer w0.2: R22.1@44.4,74.6 C24.1@44.4,76.2
  Top Layer w0.3: J9.3@40.2,74.4 44.2,74.4 R22.1@44.4,74.6
TXR: C23.1 J9.2 R21.1 | length 6
  Top Layer w0.2: C23.1@44.4,71.4 R21.1@44.4,73
  Top Layer w0.3: J9.2@40.2,71.86 43.94,71.86 C23.1@44.4,71.4
UORX: J16.0 R71.1 | length 1.6
  Top Layer w0.2: J16.0@103.6,70.2 R71.1@103.6,71.8
UOTX: J17.0 R72.2 | length 1.6
  Top Layer w0.2: J17.0@119.6,70.2 R72.2@119.6,71.8
USCL: R70.1 Z2.5 | length 4.7
  Top Layer w0.2: Z2.5@89.547,78.126 89.6,78.073 R70.1@89.6,73.4
USDA: R69.1 Z2.3 | length 4.7
  Top Layer w0.2: R69.1@87,73.4 87,78.119 Z2.3@87.007,78.126
VBUSA: J20.VBUS | length 3.8
  Top Layer w0.2: v6(151.8,85) 151.8,85.2 153.8,87.2 J20.VBUS@154.55,87.2
VIND: C1.1 D2.A D4.A J2.1 R1.1 R2.1 R12.1 | length 24.4
  Top Layer w0.2: 5.2,24 5.2,27.2 R2.1@8.2,27.2 ; D2.A@8.2,22 R1.1@8.2,24 ; D4.A@12.8,22 13,22.2 R12.1@15.6,22.2
  Top Layer w0.5: J2.1@3,21.8 3,23.8 3.2,24 5.2,24 C1.1@6.2,24 6.2,23 7.2,22 D2.A@8.2,22 D4.A@12.8,22
VINS: C5.1 R1.2 R4.2 R7.2 Z2.40 | length 190.5
  Top Layer w0.2: R1.2@8.2,25.6 R4.2@10,25.6 R7.2@11.8,25.6 C5.1@13.6,25.6 15.2,25.6 16.5,26.9 16.5,33.124 16.676,33.3 16.7,33.3 16.8,33.4 53.6,33.4 57.6,37.4 84.4,37.4 91.4,44.4 v1(141.2,44.4) ; v1(131.4,66) v1(139.2,66)
  Bottom Layer w0.2: v1(131.4,66) 131.461,66.061 131.461,79.295 132.727,80.561 Z2.40@132.727,80.666 ; v1(139.2,66) 139.2,65.8 142,63 142,57.2 141.2,56.4 v1(141.2,44.4)
VMON: C6.1 R2.2 R5.2 R8.2 U8.3 | length 80.3
  Top Layer w0.2: R2.2@8.2,28.8 9.8,27.2 R5.2@10,27.2 R8.2@11.8,27.2 v1(12.7,27.2) C6.1@13.6,27.2
  Bottom Layer w0.2: v1(12.7,27.2) 12.6,27.2 13.2,26.6 13.2,10.2 15.4,8 19,8 22,5 47.4,5 50,7.6 57.2,7.6 58.8,9.2 63.16,9.2 65.08,7.28 U8.3@65.08,7.6
WDIN: R46.2 R49.1 R50.2 | length 4.5
  Top Layer w0.2: R46.2@60.8,21.2 60.8,20.4 62.4,20.4 ; R49.1@62.4,21.2 62.4,20.4 ; R50.2@62.6,19.2 62.4,19.4 62.4,20.4
WDOUT: R59.2 Z2.31 | length 151
  Top Layer w0.2: R59.2@67.6,19.2 68.2,19.2 69.4,18 69.4,5.6 70,5 125.814,5 129.007,8.193 130.593,8.193 v1(130.6,8.2)
  Bottom Layer w0.2: Z2.31@122.567,78.126 122.567,72.633 123.8,71.4 123.8,70.4 124.056,70.144 124.056,59.691 124.671,59.076 125.124,59.076 125.6,58.6 125.6,50.434 130.4,45.634 130.4,8.4 v1(130.6,8.2)
pads on no net: FID1.0 FID1.1 FID2.0 FID2.1 FID3.0 FID3.1 FID4.0 FID4.1 J13.1 PFID1.0 PFID1.1 PFID2.0 PFID2.1 U7.1 U7.2 U7.3 U7.5 U7.33 U7.34 U7.36 U7.37 U7.38 U7.41 U7.42 U7.43 U7.44 U7.45 U7.48 Z1.1 Z1.2 Z1.3 Z1.4 Z1.5 Z1.6 Z1.7 Z1.8 Z1.9 Z1.10 Z1.11 Z1.12 Z1.13 Z1.14 Z1.15 Z1.16 Z1.17 Z1.18 Z1.19 Z1.20 Z1.21 Z1.22 Z1.23 Z1.24 Z1.25 Z1.26 Z1.27 Z1.28 Z1.29 Z1.30 Z1.31 Z1.32 Z1.33 Z1.34 Z1.35 Z1.36 Z1.37 Z1.38 Z1.39 Z1.40 Z2.1 Z2.2 Z2.4 Z2.8 Z2.10 Z2.11 Z2.14 Z2.16 Z2.17 Z2.20 Z2.22 Z2.24 Z2.25 Z2.26 Z2.27 Z2.28 Z2.30 Z2.38 Z3. Z3.2
copper on no net: | length 88
  Top Layer w0.2: 121.806,29 ccw(c107.8,29) 121.806,29

## Polygon pours and split planes (outlines as drawn)
GND on Bottom Layer "P1" (solid, remove dead copper, pour order 0): 2.5,97.5 2.5,2.5 160,2.5 160,97.5
3V3 on Internal Plane 2 (split plane): 160.89,0.51 0.51,0.51 0.51,99.49 160.89,99.49
GND on Internal Plane 1 (split plane): 160.89,0.51 0.51,0.51 0.51,99.49 160.89,99.49

## Other copper
Top Layer:
  rectangle net GND: 0.2,95.8 161.2,99.8
  rectangle net GND: 0.2,0.2 161.2,4.2
  region net 5V: 31.8,26 31.8,25 32.6,25 32.6,24 34.6,24 34.6,18 47.6,18 47.6,22.8 40,22.8 40,25.2 39.2,25.2 39.2,26
  region net GND: 19.4,17.6 19.4,22.4 19,22.4 19,29.6 26.6,29.6 26.6,29 30.4,29 30.4,28.8 43.8,28.8 43.8,27.6 48.2,27.6 48.2,26.2 50,26.2 50,33 16.8,33 16.8,17.6
  region net SV: 21.8,16.6 21.8,22.2 20.8,22.2 20.8,25 23.8,25 23.8,23.2 25.2,23.2 25.2,17 22.8,17 22.8,16.6
  region net 3V3: 58.6,31.8 61.2,31.8 61.2,31.2 63,31.2 63,28 59.2,28 59.2,26.6 70.8,26.6 70.8,37 58.6,37
  text "Top Layer" at 133.128,118.801 h0.8
  text "1" at 55.7,40.4 h3
Bottom Layer:
  rectangle net GND: 0.2,0.2 161.2,4.2
  rectangle net GND: 0.2,95.8 161.2,99.8
  text "bottom layer" at 133.8,110.9 h1.52
  text "4" at 66.5,40.4 h3
Internal Plane 1 (plane layer: these items are gaps in the copper):
  rectangle: 61.3,39.6 69.3,44
  rectangle: 54.5,39.6 57.7,44.4
  text "Internal Plane 1" at 133.6,116.1 h0.8
  text "2" at 58.5,40.4 h3
Internal Plane 2 (plane layer: these items are gaps in the copper):
  rectangle: 65.3,39.4 69.7,44.2
  rectangle: 54.5,39.4 61.7,44.4
  text "Internal Plane 2" at 133.128,113.601 h0.8
  text "3" at 62.5,40.4 h3

## Silkscreen, mask and mechanical layers (free items; w line width, h text height)
Top Overlay:
  lines w0.2: 41.4,65.2 48.8,65.2 49.8,66.2 ; 63.6,79.4 65.2,81 65.7,81 ; 41.4,68 41.4,61.6 41.2,61.4 38,61.4 37.8,61.6 37.8,68 41.4,68 ; 41.4,68 41.4,68 ; 64,81 67.4,81 67.4,86.8 64,86.8 64,81
  text "Top Overlay" at 133.528,120.401 h0.8
  text "TO SUIT HAMMOND 1455 N 1602  ENCLOSURE" at 24.2,105 h3
  text "AUDIO USB" at 140.4,93.2 h1.5
  text "GPS1" at 54.8,90.8 h1.5
  text "nc" at 79,90.8 h1.5
  text "T" at 85.4,88 h1.5
  text "R" at 88,88 h1.5
  text "CT" at 91.2,88 h1.5
  text "RXL" at 32.4,78.8 h1.5
  text "RXR" at 32,76.2 h1.5
  text "TXL" at 32,73.8 h1.5
  text "TXR" at 32,71.2 h1.5
  text "GND" at 32.6,68.6 h1.5
  text "UORX" at 102.2,65.4 h1.5 r90
  text "SCL" at 90.4,65.2 h1.5 r90
  text "PWM" at 123,65 h1.5 r90
  text "SDA" at 87.6,64.8 h1.5 r90
  text "RS232 USB" at 149,64.8 h1.5
  text "UOTX" at 120.2,63.8 h1.5 r90
  text "GPQE" at 19.6,61.8 h1.5
  text "GPQC" at 19.6,59.4 h1.5
  text "GPLEDK" at 17.8,56.6 h1.5
  text "PTTA" at 68.8,55 h1.5
  text "GPLEDA" at 18.2,54.6 h1.5
  text "T2I" at 22.2,48.8 h1.5
  text "PTTB" at 68.8,47.6 h1.5
  text "R2O" at 22,46 h1.5
  text "R1I" at 22,43.6 h1.5
  text "R2O" at 21.8,41.2 h1.5
  text "T1I" at 21.8,38.6 h1.5
  text "T2O" at 21.8,35.8 h1.5
  text "VIN" at 0,24.6 h1.5
  text "5V" at 49.8,13.2 h1.5 r90
  text "G" at 53.2,10.6 h1.5
  text "G" at 48.6,10.4 h1.5
  text "FAN+" at 124.2,8.2 h1.5 r90
  text "FAN-" at 113.6,8 h1.5 r90
  text "GND" at 1,5.8 h1.5
Mechanical 4:
  text "Mechanical 4" at 133.528,123.201 h0.8
Mechanical 5:
  the board outline again, w0.1
  text "Panel  route  on Mechanical 5" at 44.2,101.3 h1.52
Mechanical 6:
  lines w1: 94.2,29.4 cw(c107.6,29.2) 107.8,42.6 cw(c107.8,29) 121.4,29 cw(c107.8,29) 107.8,15.4 cw(c108,29.2) 94.2,29.4

## Text inside footprints (layer, text, board x,y; h text height)
D5: Top Overlay "k" at 18.75,15.75 h0.7
D9: Top Overlay "k" at 49.3,63.15 h0.7
D10: Top Overlay "k" at 50.45,28.55 h0.7 r90
J20: Top Overlay "no traces" at 162.7,86.55 h0.8 r135
Z1: Top Overlay "C1 C2 top" at 112.4,57 h1 r180; Mechanical 1 "USB" at 88.1,17.9 h1.3 r180; Mechanical 1 "PWR" at 127.1,18.9 h1.3 r180